# Altium PCB Quadro.PcbDoc (part 2 of 2)
Units mm, origin at the board's own origin, x right, y up, seen from the top; angles counter-clockwise.
Board outline 388.52 x 333.5 mm, 2 copper layers (Top Layer, Bottom Layer); 70 components, 65 nets, 291 pads, 66 vias.
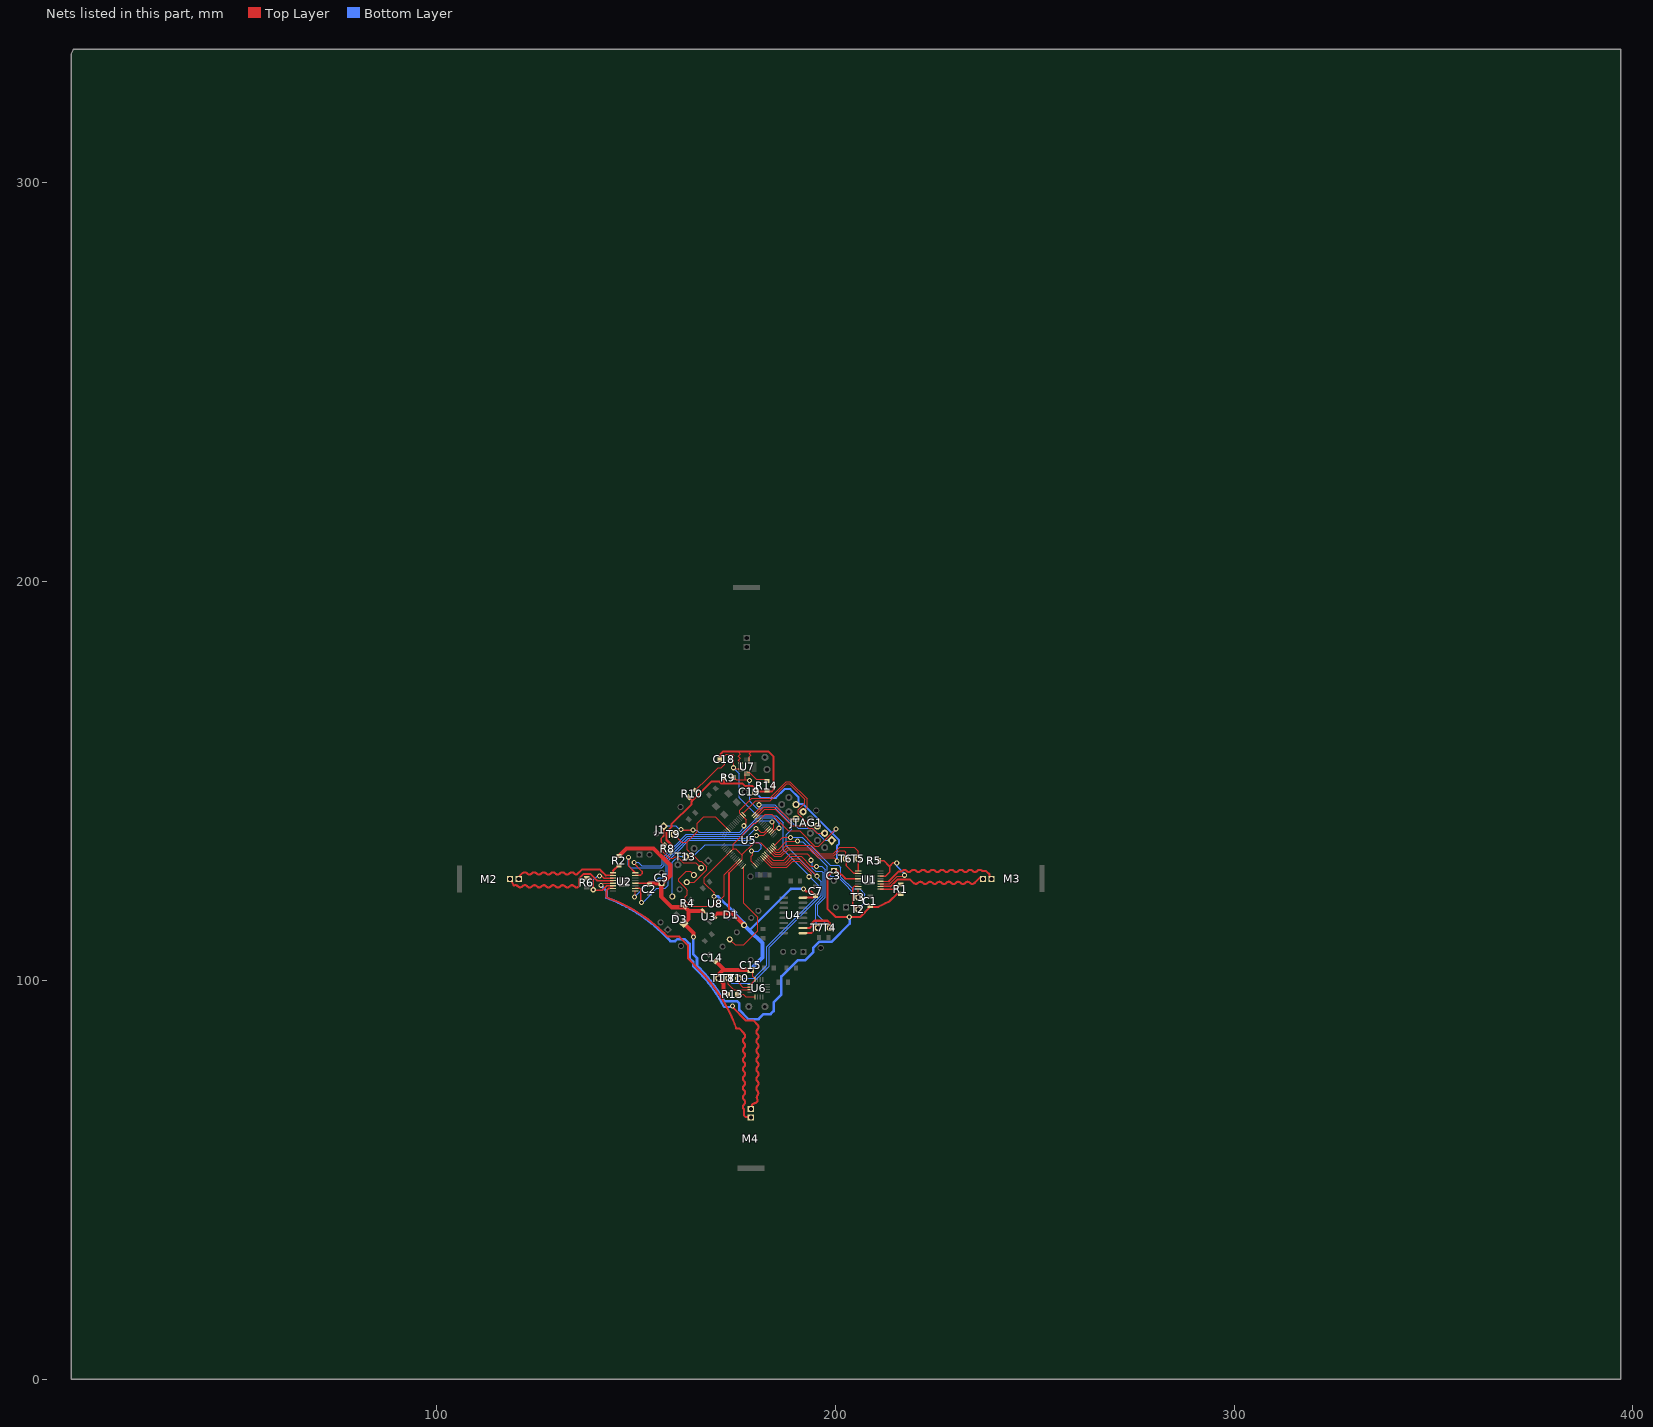
[diagram p2: the nets of this part, all layers, seen from the top]

## Via types
v1: diameter 1.27, hole 0.711, Top Layer to Bottom Layer, 54 vias
v2: diameter 1.7, hole 1.4, Top Layer to Bottom Layer, 8 vias
v3: diameter 7, hole 6, Top Layer to Bottom Layer, 4 vias

## Nets (pads, with @x,y where several pads share a name; then routed paths per layer and width w, separated by ;. In a path a pad name is that pad's centre, name@x,y a point inside that pad or via, vN(x,y) a via of type N, cw(c..) or ccw(c..) an arc to the next point about the centre after c; other vN are vias at no path point) (continued)
NetM2_1: M2.1 U2.4 | length 30.7
  Top Layer w0.305: U2.4@144.325,125.025 U2.4@144.35,125.05
  Top Layer w0.381: 140.329,125.025 U2.4@144.325,125.025
  Top Layer w0.508: M2.1@117.908,125.456 M2.1@118.288,125.075 ; M2.1@118.567,125.425 119.375,123.85 ; 119.448,123.81 cw(c119.813,123.141) 120.352,123.68 ; 120.465,123.589 ccw(c121.004,124.128) 121.545,123.591 ; 121.635,123.678 cw(c122.176,123.141) 122.715,123.68 ; 122.827,123.564 ccw(c123.366,124.102) 123.907,123.565 ; 124.041,123.671 cw(c124.581,123.134) 125.12,123.673 ; 125.222,123.571 ccw(c125.761,124.11) 126.302,123.573 ; 126.378,123.671 cw(c126.918,123.134) 127.457,123.673 ; 127.559,123.571 ccw(c128.098,124.11) 128.638,123.573 ; 128.727,123.673 cw(c129.268,123.136) 129.807,123.674 ; 129.934,123.569 ccw(c130.473,124.108) 131.013,123.571 ; 131.102,123.671 cw(c131.643,123.134) 132.182,123.673 ; 132.283,123.571 ccw(c132.822,124.11) 133.363,123.573 ; 133.439,123.671 cw(c133.979,123.134) 134.518,123.673 ; 134.62,123.571 ccw(c135.159,124.11) 135.7,123.573 135.7,125.565 136.83,126.695 138.659,126.695 140.329,125.025
NetM2_2: M2.2 U2.2 | length 25.7
  Top Layer w0.381: 142.45,126.35 U2.2@144.272,126.35
  Top Layer w0.508: M2.2@120.299,125.674 121.493,126.868 ; 121.609,126.928 cw(c122.125,126.367) 122.664,126.906 ; 122.776,126.815 ccw(c123.315,127.354) 123.856,126.817 ; 123.946,126.904 cw(c124.487,126.367) 125.026,126.906 ; 125.139,126.79 ccw(c125.678,127.328) 126.218,126.791 ; 126.352,126.897 cw(c126.893,126.36) 127.432,126.898 ; 127.533,126.797 ccw(c128.072,127.335) 128.613,126.798 ; 128.689,126.897 cw(c129.23,126.36) 129.769,126.898 ; 129.87,126.797 ccw(c130.409,127.335) 130.95,126.798 ; 131.039,126.898 cw(c131.579,126.361) 132.118,126.9 ; 132.245,126.795 ccw(c132.784,127.334) 133.325,126.797 ; 133.413,126.897 cw(c133.954,126.36) 134.493,126.898 ; 134.595,126.797 ccw(c135.134,127.335) 135.22,126.578 136.53,127.889 140.919,127.889 141.3,127.508 ; 141.347,127.453 142.45,126.35
NetM3_1: M3.1 U1.4 | length 29.6
  Top Layer w0.305: U1.4@211.328,124.886 213.43,124.886 ; 216.637,127.356 216.764,127.483
  Top Layer w0.508: 213.43,124.886 215.9,127.356 216.637,127.356 ; 216.809,127.488 cw(c217.349,126.951) 217.888,127.49 ; 217.899,127.45 ccw(c218.438,127.989) 218.979,127.452 ; 219.12,127.539 cw(c219.661,127.002) 220.2,127.541 ; 220.312,127.45 ccw(c220.851,127.989) 221.392,127.452 ; 221.482,127.539 cw(c222.023,127.002) 222.562,127.541 ; 222.675,127.425 ccw(c223.214,127.963) 223.754,127.426 ; 223.888,127.532 cw(c224.429,126.995) 224.968,127.533 ; 225.069,127.432 ccw(c225.608,127.97) 226.149,127.433 ; 226.225,127.532 cw(c226.766,126.995) 227.305,127.533 ; 227.406,127.432 ccw(c227.945,127.97) 228.486,127.433 ; 228.575,127.533 cw(c229.115,126.996) 229.654,127.535 ; 229.781,127.43 ccw(c230.32,127.969) 230.861,127.432 ; 230.949,127.532 cw(c231.49,126.995) 232.029,127.533 ; 232.131,127.432 ccw(c232.67,127.97) 233.21,127.433 ; 233.286,127.532 cw(c233.827,126.995) 234.366,127.533 ; 234.467,127.432 ccw(c235.006,127.97) 235.547,127.433 ; 235.681,127.539 cw(c236.222,127.002) 236.761,127.541 ; 236.843,127.425 237.852,127.425 238.675,126.602 238.675,126.175 M3.1@238.725,126.125
NetM3_2: M3.2 U1.2 | length 27.2
  Top Layer w0.381: U1.2@211.328,123.586 213.883,123.586
  Top Layer w0.508: 213.883,123.586 215.57,125.273 218.77,125.273 219.583,124.46 ; 219.652,124.453 ccw(c220.191,124.991) 220.732,124.454 ; 220.822,124.542 cw(c221.363,124.005) 221.902,124.543 ; 222.014,124.427 ccw(c222.553,124.966) 223.094,124.429 ; 223.228,124.535 cw(c223.768,123.998) 224.307,124.536 ; 224.409,124.435 ccw(c224.948,124.973) 225.489,124.436 ; 225.565,124.535 cw(c226.105,123.998) 226.644,124.536 ; 226.746,124.435 ccw(c227.285,124.973) 227.825,124.436 ; 227.914,124.536 cw(c228.455,123.999) 228.994,124.538 ; 229.121,124.433 ccw(c229.66,124.972) 230.2,124.435 ; 230.289,124.535 cw(c230.83,123.998) 231.369,124.536 ; 231.47,124.435 ccw(c232.009,124.973) 232.55,124.436 ; 232.626,124.535 cw(c233.166,123.998) 233.705,124.536 ; 233.807,124.435 ccw(c234.346,124.973) 234.962,124.524 ; 234.874,124.511 235.026,124.511 236.488,125.973 M3.2@236.488,125.984
NetM4_1: M4.1 U2.7 | length 77.9
  Top Layer w0.381: 143.219,123.1 U2.7@144.272,123.1 ; 163.043,105.639 163.093,105.512
  Top Layer w0.508: 142.621,120.828 142.621,122.502 143.219,123.1 ; 142.677,120.848 cw(c129.238,83.195) 157.954,111.011 ; 157.954,111.011 160.921,111.011 163.043,108.89 163.043,105.639 ; 163.093,105.512 165.938,102.616 ; 165.906,102.584 cw(c137.691,74.386) 175.176,88.029 ; 175.158,87.986 175.87,87.986 ; 175.895,87.986 177.163,86.717 177.163,86.652 cw(c176.626,86.112) 177.165,85.573 ; 177.056,68.841 ccw(c177.595,68.302) 177.058,67.762 177.058,66.223 177.521,65.761 178.74,65.761 M4.1@178.765,65.735 ; 177.056,83.04 ccw(c177.595,82.501) 177.058,81.96 ; 177.062,75.933 ccw(c177.6,75.394) 177.063,74.854 ; 177.063,71.247 ccw(c177.602,70.708) 177.065,70.167 ; 177.063,73.584 ccw(c177.602,73.045) 177.065,72.504 ; 177.063,78.308 ccw(c177.602,77.769) 177.065,77.229 ; 177.063,80.645 ccw(c177.602,80.106) 177.065,79.565 ; 177.063,85.471 ccw(c177.602,84.932) 177.065,84.391 ; 177.163,72.428 cw(c176.626,71.888) 177.165,71.349 ; 177.163,74.765 cw(c176.626,74.224) 177.165,73.685 ; 177.163,79.489 cw(c176.626,78.949) 177.165,78.41 ; 177.163,81.826 cw(c176.626,81.286) 177.165,80.747 ; 177.165,77.14 cw(c176.628,76.599) 177.167,76.06 ; 177.171,70.033 cw(c176.634,69.493) 177.172,68.954 ; 177.171,84.257 cw(c176.634,83.717) 177.172,83.178
NetM4_2: M4.2 U2.5 | length 83.8
  Top Layer w0.305: v1@141.325,123.95 141.775,124.4 U2.5@144.272,124.4 ; v1@174.25,93.263 v1(174.25,93.575) ; 179.4,89.967 179.4,89.992
  Top Layer w0.508: v1@174.25,93.263 177.546,89.967 179.4,89.967 ; M4.2@178.791,67.285 M4.2@178.791,68.199 ; M4.2@179.106,68.068 cw(c179.778,68.427) 179.778,69.189 ; 179.4,89.992 180.543,88.849 ; 179.759,69.241 ccw(c179.759,70.003) 180.521,70.006 ; 180.434,73.489 ccw(c180.973,72.95) 180.436,72.41 ; 180.434,75.852 ccw(c180.973,75.313) 180.436,74.772 ; 180.44,82.944 ccw(c180.979,82.405) 180.442,81.864 ; 180.442,78.257 ccw(c180.98,77.718) 180.443,77.178 ; 180.442,80.594 ccw(c180.98,80.055) 180.443,79.515 ; 180.442,85.319 ccw(c180.98,84.78) 180.443,84.239 ; 180.442,87.655 ccw(c180.98,87.116) 180.443,86.576 ; 180.498,72.269 cw(c179.961,71.728) 180.5,71.189 ; 180.523,74.682 cw(c179.986,74.141) 180.525,73.602 ; 180.536,71.203 ccw(c181.075,70.664) 180.538,70.124 ; 180.542,79.439 cw(c180.005,78.898) 180.543,78.359 ; 180.542,81.775 cw(c180.005,81.235) 180.543,80.696 ; 180.542,86.5 cw(c180.005,85.959) 180.543,85.42 ; 180.542,88.837 cw(c180.005,88.296) 180.543,87.757 ; 180.543,84.15 cw(c180.006,83.61) 180.545,83.071 ; 180.549,77.044 cw(c180.012,76.503) 180.55,75.964
  Bottom Layer w0.381: 164.687,103.137 164.687,103.211 164.687,103.283 ; v1@174.006,93.381 v1@174.05,93.425
  Bottom Layer w0.508: v1@141.275,123.825 v1(141.275,123.875) v1@141.275,123.95 ; 164.414,103.53 164.643,103.302 ; 164.687,103.211 cw(c136.876,74.489) 172.111,93.381 v1@174.006,93.381
  Bottom Layer w0.635: v1@141.275,123.825 142.646,122.454 142.646,121.125 ; 142.621,120.777 cw(c128.8,83.262) 158.639,109.871 159.858,109.871 160.325,110.338 162.306,110.338 163.474,109.169 163.474,105.562 164.414,104.623 164.414,103.53
NetR1_1: R1.1 U1.1 | length 5.5
  Top Layer w0.381: U1.1@211.328,122.936 215.011,122.936
  Top Layer w0.508: 215.011,122.936 R1.1@216.281,124.206
NetR2_1: R2.1 U2.1 | length 3
  Top Layer w0.254: U2.1@143.775,127 U2.1@144.272,127
  Top Layer w0.381: U2.1@144.272,127 144.272,127.533
  Top Layer w0.508: 144.272,127.533 R2.1@145.669,128.93
NetR5_2: R5.2 U1.3 U1.6 | length 20.1
  Top Layer w0.254: U1.3@211.328,124.236 213.669,124.236 215.544,126.111 217.195,126.111 v1@217.399,126.314
  Top Layer w0.381: R5.2@210.998,130.073 211.099,129.972 212.268,129.972 213.563,128.676 ; U1.6@211.328,126.186 212.661,126.186 213.603,127.128 213.603,128.636 213.563,128.676 ; v1(215.417,129.489) 215.367,129.54 214.503,129.54 213.639,128.676 213.563,128.676
  Bottom Layer w0.381: v1(215.417,129.489) 215.417,128.69 216.085,128.023 ; 216.174,127.934 v1@217.469,126.639
  other v1: 217.322,126.39
NetR6_2: R6.2 U2.3 U2.6 | length 17.6
  Top Layer w0.254: v1@139.37,122.86 v1@139.471,122.758 ; U2.3@144.262,125.71 U2.3@144.272,125.7
  Top Layer w0.305: v1@139.522,122.58 v1@139.548,122.606
  Top Layer w0.381: R6.2@137.668,125.635 138.754,125.635 139.37,125.019 v1@139.37,122.86 ; v1@139.548,122.606 141.58,122.606 142.724,123.75 U2.6@144.272,123.75 ; v1@141.237,126.378 141.935,125.679 ; 141.961,125.7 U2.3@144.272,125.7
  Bottom Layer w0.254: v1@139.192,123.088 v1@139.624,122.657 ; v1@140.284,126.187 v1(140.868,126.187)
  Bottom Layer w0.305: v1@139.192,123.088 139.192,125.095 v1@140.284,126.187
  other v1: 139.319,122.758
NetR13_1: R13.1 U6.5 | length 4.7
  Top Layer w0.254: R13.1@175.419,96.52 176.936,96.52 177.571,95.885 U6.5@179.857,95.885
NetR14_1: R14.1 U7.7 U7.8 | length 5.7
  Top Layer w0.254: U7.7@177.927,152.194 178.407,152.194 U7.8@178.41,152.197 ; U7.8@178.427,152.194 180.151,150.47 182.601,150.47 R14.1@182.829,150.241
RFINT: T9.1 U5.12 U8.4 | length 35.4
  Top Layer w0.254: U8.4@162.763,124.638 164.617,124.638 167.792,127.813 ; 162.941,134.765 162.941,134.645 162.941,132.817 165.837,129.921 166.37,129.921 ; 165.456,139.522 165.456,139.606 ; 166.421,129.921 167.259,129.083 167.259,129.057 167.811,128.506 167.811,127.813 ; 166.947,141.097 169.85,141.097 170.485,140.462 170.51,140.462 170.804,140.168 170.804,140.157 U5.12@173.164,137.797
  Top Layer w0.305: T9.1@159.512,136.652 161.519,134.645 162.941,134.645 ; 162.941,134.765 165.456,137.28 165.456,139.446 ; 165.481,139.598 166.972,141.09
RFWAKE: U5.28 U8.3 | length 33.2
  Top Layer w0.254: 162.636,122.987 160.782,124.841 160.782,125.476 162.687,127.381 163.601,127.381 U8.3@164.567,126.416 ; 162.662,122.936 162.941,122.657 162.941,121.539 162.408,121.006 162.408,119.939 163.779,118.567 169.367,118.567 172.11,121.31 172.11,126.492 174.447,128.829 ; 174.422,128.767 U5.28@175.639,129.984
RST: J1.1 JTAG1.9 R8.1 U5.2 U8.2 | length 70.5
  Top Layer w0.254: J1.1@157.048,138.13 J1.1@157.048,138.659 ; v1@177.038,138.836 177.724,139.522 177.724,140.308 U5.2@176.699,141.333 176.073,141.959 176.073,142.697 179.121,145.745 183.566,145.745 187.681,149.86 188.646,149.86 192.989,145.517 192.989,143.383 JTAG1.9@191.999,142.392
  Top Layer w0.305: R8.1@157.124,133.909 156.896,133.68 156.896,132.207 158.496,130.607 159.334,130.607 159.817,131.089 160.401,131.089 161.925,129.565 165.024,129.565 165.43,129.159 ; 165.456,129.148 U8.2@166.352,128.252
  Top Layer w0.381: J1.1@156.972,138.684 156.972,136.296 156.312,135.636 156.312,134.722 R8.1@157.099,133.934 ; J1.1@157.15,138.563 J1.1@157.15,138.633 ; v1@161.468,137.719 v1(164.287,137.719)
  Bottom Layer w0.254: v1(164.287,137.719) 165.227,137.719 165.786,137.16 176.022,137.16 v1@177.241,138.379
  Bottom Layer w0.305: J1.1@156.997,138.659 157.175,138.836 159.969,138.836 160.909,137.897 v1(161.29,137.897)
  other v1: 177.063,138.811
RXD: T7.1 U4.9 U5.42 | length 37.7
  Top Layer w0.254: U5.42@182.745,131.752 184.404,130.093 187.09,130.093 188.722,131.724 192.938,131.724 194.081,130.581 v1@194.081,130.302
  Top Layer w0.508: U4.9@191.884,111.887 194.031,111.887 T7.1@195.224,113.081
  Bottom Layer w0.254: v1@194.259,130.124 194.259,128.179 195.047,127.392 196.61,127.392 196.977,127.025 196.977,126.578 197.002,126.553 197.002,121.114 195.047,119.159 195.047,114.576 195.428,114.195 T7.1@195.428,113.436 ; T7.1@195.047,113.817 T7.1@195.428,113.436 ; T7.1@195.428,113.386 T7.1@195.428,113.436 ; T7.1@195.478,113.386 T7.1@195.428,113.436
  other v1: 193.904,130.15
SCL: R10.1 T10.1 U5.39 U6.2 U7.4 | length 116.5
  Top Layer w0.254: R10.1@164.859,147.587 R10.1@164.915,147.643 ; v1(174.447,153.34) v1@174.447,153.365 ; v1@174.727,153.391 v1@175.023,153.094 ; T10.1@175.717,99.847 175.717,100.584 T10.1@175.743,100.609 ; T10.1@175.793,100.508 175.743,100.457 175.743,99.466 176.84,98.369 U6.2@178.648,98.369 ; T10.1@175.819,100.584 T10.1@175.819,100.66 ; U5.39@181.684,130.691 183.928,128.448 187.866,128.448 189.339,129.921 190.957,129.921 193.98,126.898 193.98,126.365 v1@193.548,125.933
  Top Layer w0.305: R10.1@164.915,147.643 168.123,150.851 ; 168.123,150.825 170.612,153.314 171.399,153.314 172.263,154.178 172.263,156.362 172.644,156.743 174.269,156.743 174.523,156.489 v1@174.523,153.365 ; v1@175.023,153.094 U7.4@176.527,153.094
  Bottom Layer w0.254: 182.855,103.886 182.855,108.509 ; v1(193.396,126.009) v1@193.396,126.34
  Bottom Layer w0.305: v1(174.447,153.34) 175.946,151.841 ; T10.1@175.768,100.584 179.553,100.584 182.855,103.886 ; 175.92,145.771 175.92,151.816 ; 175.946,145.796 180.442,141.3 185.191,141.3 186.944,139.548 186.944,132.791 v1@193.396,126.34 ; 182.855,108.509 195.936,121.59 195.936,123.622 v1@193.472,126.086
SCLK: T13.1 U5.34 U8.6 | length 40.1
  Top Layer w0.254: v1@179.248,132.385 179.248,131.47 178.943,131.166 178.943,129.897 U5.34@179.917,128.923
  Bottom Layer w0.254: U8.6@159.168,121.068 159.168,124.435 ; 159.182,124.529 159.182,129.591 160.836,131.245 160.891,131.191 T13.1@162.585,131.191 ; T13.1@163.017,131.47 164.788,131.47 167.353,134.036 179.259,134.036 179.843,134.62 180.746,134.62 181.407,133.96 181.407,133.198 ; v1(178.968,132.461) 180.67,132.461 181.407,133.198 ; 181.407,133.172 181.407,133.198 ; 181.458,133.248 181.407,133.198
SDA: R9.1 T8.1 U5.40 U6.3 U7.6 | length 105.9
  Top Layer w0.254: T8.1@173.152,100.051 T8.1@173.152,100.381 ; T8.1@173.152,100.559 173.203,100.508 173.203,99.035 174.518,97.719 U6.3@178.648,97.719 ; v1@178.308,150.368 v1@178.397,150.457 ; v1@178.41,150.444 v1@178.397,150.457 ; v1@178.435,150.495 v1@178.397,150.457 ; U5.40@182.038,131.044 184.076,129.007 187.706,129.007 189.23,130.531 191.11,130.531 v1@195.453,126.187
  Top Layer w0.305: R9.1@174.574,150.978 175.184,150.368 177.427,150.368 ; U7.6@177.427,151.894 177.427,150.368 ; v1@178.308,150.368 177.427,150.368
  Bottom Layer w0.305: T8.1@172.987,100.343 174.066,99.263 179.197,99.263 183.464,103.53 183.464,108.382 196.494,121.412 196.494,124.739 v1@195.428,125.806 ; v1@178.41,149.708 178.41,148.26 178.562,148.107 178.562,144.969 180.478,143.053 181.32,143.053 181.828,143.561 184.597,143.561 189.103,139.054 189.103,137.962 187.731,136.59 187.731,133.807 v1@195.377,126.162
  other v1: 195.428,126.162 178.46,150.19
SS: U5.32 U8.8 | length 26.5
  Top Layer w0.305: U8.8@173.66,110.134 174.879,108.915 177.038,108.915 180.594,112.471 180.594,115.799 177.053,119.34 U5.32@177.053,128.57
SW1F: T3.1 U1.16 U5.47 | length 31
  Top Layer w0.254: U5.47@184.513,133.519 185.216,132.817 185.699,132.817
  Top Layer w0.305: 185.699,132.817 187.757,134.874 190.246,134.874 v1@190.551,135.179 ; U1.16@205.728,122.936 205.728,120.992 T3.1@205.74,120.98
  Bottom Layer w0.305: v1@190.779,134.899 190.83,134.849 191.846,134.849 198.018,128.676 198.018,127.035 198.866,126.187 200.508,126.187 200.508,126.136 200.889,125.755 200.889,125.712 205.697,120.904 T3.1@205.74,120.904
  other v1: 190.525,134.976
SW1R: T2.1 U1.15 U5.48 | length 42.4
  Top Layer w0.254: U5.48@184.866,133.873 186.884,135.89 v1@188.265,135.89 ; T2.1@205.638,117.831 T2.1@205.74,117.831
  Top Layer w0.381: T2.1@205.638,117.831 204.343,119.126 204.343,123.215 204.714,123.586 U1.15@205.728,123.586
  Bottom Layer w0.254: v1(188.747,135.865) 188.824,135.941 191.668,135.941 191.821,135.788 ; 191.783,135.826 191.821,135.788 ; T2.1@205.638,117.856 207.442,119.659 207.442,121.641 206.121,122.961 204.394,122.961 201.422,125.933 201.422,128.321 200.889,128.854 198.755,128.854 191.821,135.788
SW2F: T5.1 U1.9 U5.46 | length 29.3
  Top Layer w0.254: U5.46@184.159,133.166 185.118,132.207
  Top Layer w0.305: 185.118,132.207 186.08,132.207 187.757,133.883 194.031,133.883 196.139,131.775 199.441,131.775 201.066,133.401 204.699,133.401 205.715,132.385 T5.1@205.715,130.759
  Top Layer w0.381: U1.9@205.728,127.486 205.728,130.544 T5.1@205.74,130.556
SW2R: T6.1 U1.10 U5.45 | length 28.7
  Top Layer w0.254: U5.45@183.806,132.812 184.944,131.674 185.014,131.674 ; 184.988,131.674 185.014,131.674 ; T6.1@202.692,130.556 202.692,132.105 202.26,132.537 200.957,132.537 199.662,131.242 195.885,131.242 193.777,133.35 187.978,133.35 186.301,131.674 185.014,131.674
  Top Layer w0.381: T6.1@202.717,130.505 202.717,128.803 204.685,126.836 U1.10@205.728,126.836
SW3F: U2.16 U5.52 | length 51.6
  Top Layer w0.254: U5.52@183.806,137.444 184.607,138.245 184.607,139.319 v1(184.15,139.776)
  Top Layer w0.305: v1@148.164,130.918 v1@148.209,130.962
  Top Layer w0.381: v1@148.164,130.918 148.164,128.708 U2.16@149.872,127
  Bottom Layer w0.254: v1@148.184,130.886 148.095,130.797 148.095,128.918 148.759,128.254 156.433,128.254 157.099,128.919 157.099,130.349 157.15,130.4 157.15,130.432 159.995,133.277 160.027,133.277 162.894,136.144 176.505,136.144 180.454,140.094 183.782,140.094 v1@184.023,139.852
  other v1: 148.158,130.886
SW3R: U2.15 U5.51 | length 52.3
  Top Layer w0.254: U5.51@184.159,137.09 184.94,137.871 ; 184.963,137.846 185.42,138.303 v1@185.801,138.303
  Top Layer w0.381: v1@149.225,129.7 151.575,127.35 151.575,126.825 151.1,126.35 U2.15@149.872,126.35
  Bottom Layer w0.254: v1(149.581,129.591) 150.647,129.591 151.477,128.762 156.223,128.762 156.591,129.13 156.591,130.559 156.642,130.61 156.642,130.643 159.784,133.785 159.817,133.785 162.684,136.652 176.294,136.652 180.434,140.792 184.571,140.792 186.004,139.359 v1@186.004,138.151
  other v1: 185.903,138.176
SW4F: U2.9 U5.54 | length 44.6
  Top Layer w0.254: v1@149.872,121.228 U2.9@149.872,122.45 ; v1(180.111,138.151) 180.315,138.151 181.28,137.185 182.093,137.185 ; 182.118,137.185 182.133,137.185 U5.54@183.099,138.151
  Bottom Layer w0.254: v1(149.657,120.904) 153.543,124.79 ; 153.543,124.816 154.757,124.816 155.747,125.806 156.887,125.806 157.607,126.527 157.607,130.139 ; 157.658,130.222 160.205,132.769 ; 160.238,132.769 163.104,135.636 177.571,135.636 v1@180.099,138.163
SW4R: U2.10 U5.53 | length 47.7
  Top Layer w0.254: v1@180.264,136.449 182.104,136.449 U5.53@183.452,137.797
  Top Layer w0.381: U2.10@149.872,123.1 151.025,123.1 151.167,122.958 151.167,122.007 ; v1@151.174,119.583 151.174,121.949
  Bottom Layer w0.254: v1(151.435,119.532) 151.689,119.532 155.296,123.139 157.404,123.139 158.115,123.85 158.115,129.928 158.166,129.979 158.166,130.012 160.416,132.261 160.448,132.261 163.315,135.128 178.914,135.128 v1@180.173,136.387
  other v1: 180.238,136.373
TCK: JTAG1.5 U5.1 | length 30.7
  Top Layer w0.254: U5.1@176.911,141.884 176.911,141.961 180.061,145.11 183.649,145.11 187.891,149.352 188.443,149.352 192.329,145.466 192.329,144.485 190.682,142.838 190.682,141.786 193.222,139.246 193.24,139.246 193.726,138.76 JTAG1.5@195.58,138.76
TDI: JTAG1.1 U5.64 | length 25.1
  Top Layer w0.254: U5.64@179.563,141.686 181.206,143.33 v1@181.206,144.046
  Bottom Layer w0.254: v1(180.899,144.069) 184.81,144.069 185.294,143.586 185.294,143.582 186.038,142.838 186.041,142.838 187.09,141.79 187.09,141.786 187.834,141.042 187.837,141.042 188.886,139.993 188.886,139.99 190.682,138.194 194.274,138.194 196.814,135.654 196.814,135.621 197.231,135.204 JTAG1.1@199.238,135.204
TDO: JTAG1.3 U5.62 | length 20.4
  Top Layer w0.254: U5.62@180.27,140.979 182.293,143.002 184.912,143.002 189.052,138.862 192.735,138.862 193.403,138.194 194.274,138.194 195.486,136.982 JTAG1.3@197.333,136.982
TMS: JTAG1.10 U5.63 | length 12.2
  Top Layer w0.254: U5.63@179.917,141.333 182.043,143.459 185.344,143.459 188.29,140.513 JTAG1.10@189.992,140.513
TXD: T4.1 U4.10 U5.41 | length 43.6
  Top Layer w0.254: U5.41@182.392,131.398 184.224,129.565 187.427,129.565 189.001,131.14 191.476,131.14 193.915,128.702 v1@195.275,128.702
  Top Layer w0.508: U4.10@191.884,113.157 193.573,113.157 194.158,113.741 194.158,114.351 194.793,114.986 198.044,114.986 198.628,114.402 T4.1@198.628,113.386
  Bottom Layer w0.254: v1@195.25,128.6 195.301,128.651 196.571,128.651 197.485,127.737 197.485,126.814 197.51,126.789 197.51,120.904 195.555,118.948 195.555,116.357 T4.1@198.628,113.284
  other v1: 195.275,128.6
VDD: C1.1 C2.1 C3.1 C5.1 D3.1 R1.2 R2.2 R4.2 U1.12 U2.12 U3.3 | length 158
  Top Layer w0.381: U2.12@149.872,124.4 C2.1@153.375,124.4 ; C2.1@153.308,124.333 C2.1@153.4,124.425 ; 202.463,125.603 202.53,125.536 U1.12@205.728,125.536 ; C1.1@208.788,118.466 C1.1@208.788,118.491 ; C1.1@208.94,118.44 C1.1@208.981,118.481
  Top Layer w0.508: R2.2@145.847,131.216 R2.2@145.847,131.318 ; C3.1@199.593,127.635 198.095,126.136 198.095,117.907 200.076,115.926 206.248,115.926 C1.1@208.788,118.466 ; C3.1@199.695,127.559 200.508,127.559 202.463,125.603 ; C1.1@208.981,118.481 210.788,118.481 cw(c229.651,83.231) 213.596,119.845 ; 213.596,119.845 215.518,121.768 R1.2@216.383,121.768
  Top Layer w0.635: D3.1@162.024,114.328 D3.1@162.075,114.328
  Top Layer w1.016: R2.2@145.847,131.318 147.65,133.121 154.432,133.121 158.623,128.93 158.623,126.34 C5.1@156.591,124.308 ; C2.1@153.308,124.333 156.362,124.333 156.362,121.082 159.08,118.364 162.357,118.364 163.322,117.399 U3.3@166.853,117.399 ; D3.1@162.024,114.328 163.17,115.474 163.17,117.246 ; D3.1@162.075,114.328 164.465,111.938 v1@164.465,111.176
  Bottom Layer w0.381: 175.946,94.209 175.971,94.183
  Bottom Layer w0.533: 165.367,103.73 cw(c138.562,76.047) 172.187,94.869
  Bottom Layer w0.635: v1@164.44,110.998 164.389,110.947 164.389,109.296 164.338,109.245 164.338,106.604 165.329,105.613 165.329,103.835 ; 172.263,94.822 175.333,94.822 175.946,94.209 175.946,92.556 178.091,90.411 178.092,90.411 178.181,90.322 180.799,90.322 182.047,91.57 183.794,91.57 184.556,92.332 184.556,94.513 186.512,96.469 186.512,101.016 190.627,105.131 192.532,105.131 194.539,107.137 194.539,108.229 ; 194.5,108.242 195.961,109.703 199.038,109.703 203.632,114.296 203.632,115.595 v1@203.429,115.799
  other v1: 164.49,110.947 203.505,115.9
VDD_S: C7.1 C14.1 C15.1 C18.2 C19.1 D1.2 JTAG1.11 R8.2 R9.2 R10.2 R13.2 R14.2 T1.1 U3.2 U4.16 U5.22 U5.29 U5.44 U5.60 U6.1 U6.16 U7.1 U7.14 U8.10 | length 288.8
  Top Layer w0.254: v1@169.621,121.183 169.621,121.996 167.201,124.417 167.201,125.788 U5.22@173.517,132.105 174.305,132.893 174.396,132.893 174.396,133.045 ; 173.355,116.713 173.355,116.776 ; 173.355,126.993 U5.29@175.992,129.63 176.708,130.346 176.708,130.821 ; 175.743,157.404 175.743,157.378 175.743,157.201 176.225,156.718 175.692,156.185 176.174,155.702 175.666,155.194 175.627,155.194 U7.1@176.227,154.594 ; 176.2,131.851 175.006,133.045 174.396,133.045 ; 176.263,131.813 176.682,131.394 176.682,130.77 ; 176.597,131.531 179.635,134.569 181.342,134.569 U5.44@183.452,132.459 184.745,131.166 186.512,131.166 188.163,132.817 193.592,132.817 195.674,130.734 199.746,130.734 v1@200.304,130.175 ; U7.14@178.435,155.042 178.435,156.159 178.791,156.515 178.46,156.845 178.943,157.328 178.943,157.353 ; U6.1@178.648,99.019 178.8,99.019 U6.16@179.908,100.127 ; C15.1@178.664,102.362 178.765,102.464 C15.1@178.765,102.54 ; C15.1@178.816,102.616 179.299,102.133 179.299,101.067 179.883,100.482 U6.16@179.883,100.381 ; 182.311,141.606 U5.60@180.977,140.272 180.075,139.37 179.578,139.37 174.396,134.188 174.396,133.045 ; 182.311,141.666 184.019,141.666 188.195,137.49 191.106,137.49 194.905,133.691 195.921,133.691 v1@200.127,137.897
  Top Layer w0.305: T1.1@170.739,100.889 T1.1@170.891,101.041 ; C19.1@179.832,147.32 C19.1@179.934,147.422
  Top Layer w0.381: R10.2@163.22,145.948 164.122,145.047 ; T1.1@170.612,100.66 T1.1@170.663,100.66 ; C18.2@171.037,155.448 C18.2@171.247,155.658 ; 173.355,116.776 173.355,126.993
  Top Layer w0.508: 157.683,137.262 157.683,135.23 159.182,133.731 159.182,132.69 158.826,132.334 R8.2@158.826,132.385 ; 157.696,137.274 158.991,138.57 ; 159.004,138.582 158.991,138.57 ; 164.109,145.009 163.97,144.869 163.97,144.234 158.991,139.255 158.991,138.57 ; 164.122,145.047 168.935,149.86 170.942,149.86 171.425,149.377 ; T1.1@170.688,100.584 170.688,101.524 ; C18.2@171.247,155.658 171.247,156.794 171.831,157.378 175.743,157.378 183.286,157.378 184.455,156.21 184.455,147.752 184.125,147.422 C19.1@179.934,147.422 ; 171.399,149.377 171.425,149.377 ; 172.053,149.449 R9.2@172.053,150.876 ; C15.1@178.791,102.641 C15.1@178.816,102.616 ; C19.1@179.781,147.345 179.781,148.209 179.172,148.819 177.317,148.819 176.759,149.377 171.425,149.377 ; U4.16@191.884,120.777 194.589,120.777 C7.1@195.065,121.253 ; v1@192.202,122.834 192.202,122.809 192.684,122.326 193.999,122.326 C7.1@195.069,121.256 ; C7.1@195.015,121.253 C7.1@195.065,121.253 ; C7.1@195.097,121.285 C7.1@195.069,121.256 ; C7.1@195.065,121.253 C7.1@195.069,121.256 ; C7.1@195.065,121.253 C7.1@195.072,121.253 C7.1@195.069,121.256
  Top Layer w0.635: U3.2@169.672,116.027 169.685,116.027 170.434,116.776 ; 171.983,102.768 171.983,102.845
  Top Layer w1.016: C14.1@169.995,104.833 171.983,102.845 ; 170.434,116.776 173.355,116.776 174.257,116.776 U8.10@177.114,113.919 ; T1.1@170.675,100.584 171.958,99.301 171.958,97.409 R13.2@172.847,96.52 ; 170.688,101.524 171.806,102.641 ; 171.983,102.641 C15.1@178.791,102.641
  Bottom Layer w0.381: JTAG1.11@190.195,144.094 JTAG1.11@190.233,144.132
  Bottom Layer w0.457: 191.872,144.272 200.965,135.179
  Bottom Layer w0.508: C19.1@179.832,147.32 181.356,145.796 185.09,145.796 187.274,147.98 188.722,147.98 190.779,145.923 JTAG1.11@190.779,144.678 ; JTAG1.11@190.156,144.272 191.795,144.272 ; 199.187,136.957 v1@200.177,137.947 ; v1(200.482,129.972) 200.482,133.858 200.965,134.341 200.965,135.179
  Bottom Layer w0.635: v1@169.57,121.107 170.639,121.107 D1.2@174.575,117.171 ; D1.2@174.523,117.196 177.128,114.591 U8.10@177.128,113.884 ; 178.511,112.598 188.798,122.885 188.798,123.012 191.922,123.012 v1@191.948,122.987 ; C15.1@178.816,102.616 C15.1@178.816,102.895
  Bottom Layer w1.016: U8.10@177.14,113.97 178.511,112.598 181.737,109.372 181.737,105.816 C15.1@178.816,102.895
  other v1: 169.621,121.056 192.024,122.911 200.177,137.998
pads on no net: JTAG1.7 JTAG1.12 JTAG1.13 JTAG1.14 M1.0 M2.0 M3.0 M4.0 U1.8 U2.8 U4.11 U4.12 U4.13 U4.14 U4.15 U5.5 U5.6 U5.7 U5.8 U5.9 U5.10 U5.11 U5.13 U5.19 U5.20 U5.21 U5.24 U5.25 U5.26 U5.27 U5.36 U5.37 U5.38 U5.49 U5.50 U5.55 U5.56 U5.57 U5.58 U5.59 U7.2 U7.3 U7.13 U7.15 U7.16 U8.9 XTAL1.3 XTAL1.4
copper on no net: | length 143.7
  Bottom Layer w1.27: 175.743,182.22 176.124,181.839 ; 179.756,182.372 179.807,182.423
  Bottom Layer w1.524: 118.11,123.444 122.809,123.444 ; 118.186,127.406 122.987,127.406 ; 175.743,182.22 175.743,185.776 ; 179.807,182.423 179.807,185.623
  Bottom Layer w1.778: 221.818,127.457 221.887,127.526 230.871,127.526 ; 222.072,123.419 222.08,123.426 230.821,123.426
  Bottom Layer w2: 122.927,123.696 131.314,123.696 ; 123.124,127.126 129.805,127.126 ; 130.542,127.36 137.986,128.742 ; 131.808,123.416 134.659,122.913 ; 174.432,91.24 177.221,76.226 177.221,73.578 177.241,73.558 ; 174.447,163.279 175.694,170.748 ; 176.072,171.022 176.072,182.067 ; 179.754,170.752 179.754,182.103 ; 179.789,169.824 181.642,164.733 ; 180.569,73 180.467,73.101 180.467,76.938 180.86,77.331 183.074,89.891 ; 216.504,121.454 223.595,124.109 ; 217.519,129.024 222.498,127.212
  other v2: 174.316,56.154 183.316,56.154 108.986,120.976 248.646,120.976 108.986,129.976 248.646,129.976 173.3,195.306 182.3,195.306
  other v3: 178.816,57.404 110.236,125.476 247.396,125.476 177.8,194.056

## Keep-outs
Keep-Out Layer:
  lines w0.254: 127.127,122.344 cw(c128.486,83.449) 155.922,111.052 ; 127.33,128.615 ccw(c127.33,167.165) 155.273,140.607 ; 154.573,139.923 162.672,148.022 ; 156.026,110.989 164.102,102.914 ; 162.31,147.703 ccw(c133.987,176.708) 174.527,176.708 ; 164.068,102.81 cw(c135.797,74.513) 175.797,74.513 ; 180.974,176.605 ccw(c220.974,176.605) 192.843,148.168 ; 182.07,74.329 cw(c222.07,74.329) 194.05,102.875 ; 192.846,148.063 200.429,140.479 ; 194.032,102.951 201.881,110.8 ; 200.469,140.447 ccw(c228.718,168.766) 228.718,128.766 ; 201.849,110.88 cw(c230.04,82.503) 230.04,122.503 ; 228.625,128.778 229.032,128.778 229.083,128.727 ; 229.057,128.753 229.26,128.549 230.124,128.549

## Silkscreen, mask and mechanical layers (free items; w line width, h text height)
Bottom Overlay:
  text "Proxicopter" at 184.658,117.221 h1.52 r45
  text "rev1.0" at 182.093,112.141 h1.02 r45